# EAGLE board rcp2pads (EAGLE 9.0.1)
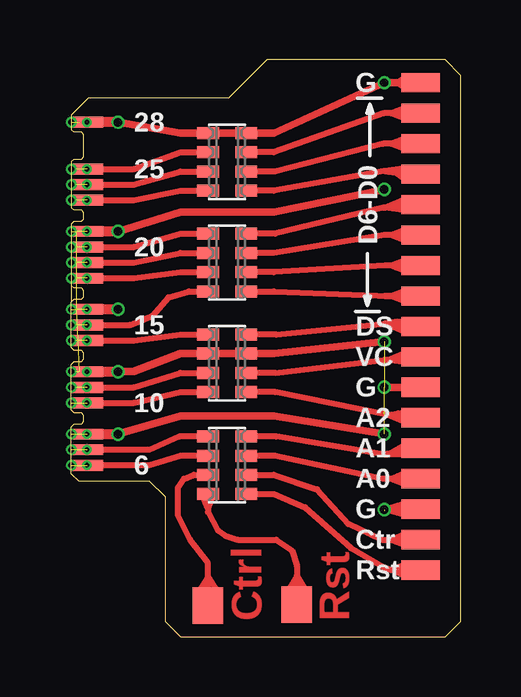
[diagram p0: board, top side]
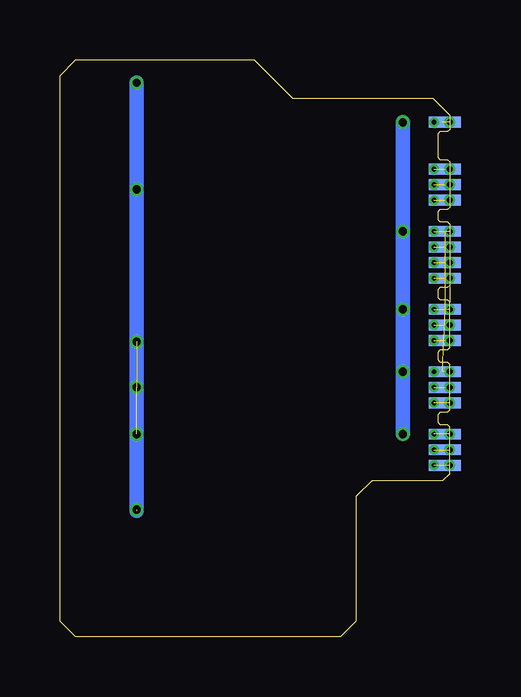
[diagram p1: board, bottom side, seen from below]

Size 16.25 x 24.05 mm. Coordinates in mm from the lower left corner, seen from the top.
Outline: 0,13.95 0.1,14.05 0.4,14.05 0.5,14.15 0.5,14.45 0.4,14.55 0.1,14.55 0,14.65 0,17.2 0.1,17.3 0.4,17.3 0.5,17.4 0.5,17.7 0.4,17.8 0.1,17.8 0,17.9 0,19.8 0.1,19.9 0.4,19.9 0.5,20 0.5,20.95 0.4,21.05 0.1,21.05 0,21.15 0,21.75 0.7,22.45 6.55,22.45 8.15,24.05 15.6,24.05 16.25,23.4 16.25,0.65 15.6,0 4.55,0 3.9,0.65 3.9,5.85 3.25,6.5 0.3,6.5 0,6.8 0,8.75 0.1,8.85 0.4,8.85 0.5,8.95 0.5,9.25 0.4,9.35 0.1,9.35 0,9.45 0,11.35 0.1,11.45 0.4,11.45 0.5,11.55 0.5,11.85 0.4,11.95 0.1,11.95 0,12.05 0,13.95
Outline: 0,14.6 0,13.95
Copper layers (1*16): Top 0.018mm / dielectric 1.55mm / Bottom 0.018mm
Design rules "Multi-CB_2L_100um-Tracks_OL35um": minimum track width 0.1mm, minimum drill 0.2mm, track to track 0.1mm, track to pad 0.1mm, pad to pad 0.1mm, via to via 0.1mm, smd to smd 0mil, copper to edge 0.2mm, drill to drill 0.2mm, minimum pad ring 0.125mm, minimum via ring 0.1mm, stop-mask expansion 2mil, vias tented up to drill 0.45mm, thermal gap 0.2mm

## Footprints (pad centres in the part's own frame; a part is rotated, then mirrored left to right if it is on the bottom)
CTS742C083 = smd 0.5 x 0.9: 1 -1.2,-0.8; 2 -0.4,-0.8; 3 0.4,-0.8; 4 1.2,-0.8; 5 1.2,0.8; 6 0.4,0.8; 7 -0.4,0.8; 8 -1.2,0.8
SMD0.8SQ = smd 1.27 x 1.524: P$1 0,0
SMD0,45-1,35 = smd 1.35 x 0.45: P$1 0,0
SMD0,8-1,6 = smd 0.8 x 1.6: P$1 0,0

## Placement (x,y rotation side)
E$1  [CTS742C083]  6.5,7.15 90 top
E$2  [SMD0.8SQ]  5.7,1.3 0 top
E$3  [CTS742C083]  6.5,19.8 270 top
E$4  [CTS742C083]  6.5,15.6 270 top
E$5  [CTS742C083]  6.5,11.4 270 top
E$6  [SMD0.8SQ]  9.4,1.35 0 top
E$8  [SMD0,45-1,35]  0.65,10.4 0 top
E$9  [SMD0,45-1,35]  0.65,11.05 0 top
E$10  [SMD0,45-1,35]  0.65,12.35 0 top
E$11  [SMD0,45-1,35]  0.65,13 0 top
E$12  [SMD0,45-1,35]  0.65,13.65 0 top
E$13  [SMD0,45-1,35]  0.65,14.95 0 top
E$14  [SMD0,45-1,35]  0.65,15.6 0 top
E$15  [SMD0,45-1,35]  0.65,16.25 0 top
E$16  [SMD0,45-1,35]  0.65,16.9 0 top
E$17  [SMD0,45-1,35]  0.65,18.2 0 top
E$18  [SMD0,45-1,35]  0.65,18.85 0 top
E$19  [SMD0,45-1,35]  0.65,19.5 0 top
E$20  [SMD0,8-1,6]  14.56,21.83 90 top
E$21  [SMD0,8-1,6]  14.56,23.1 90 top
E$22  [SMD0,45-1,35]  0.2,19.5 0 bottom
E$23  [SMD0,45-1,35]  0.2,18.85 0 bottom
E$24  [SMD0,45-1,35]  0.2,18.2 0 bottom
E$25  [SMD0,45-1,35]  0.2,16.9 0 bottom
E$26  [SMD0,45-1,35]  0.2,16.25 0 bottom
E$27  [SMD0,45-1,35]  0.2,15.6 0 bottom
E$28  [SMD0,45-1,35]  0.2,14.95 0 bottom
E$29  [SMD0,45-1,35]  0.2,13.65 0 bottom
E$30  [SMD0,45-1,35]  0.2,13 0 bottom
E$31  [SMD0,45-1,35]  0.2,12.35 0 bottom
E$32  [SMD0,45-1,35]  0.2,11.05 0 bottom
E$33  [SMD0,45-1,35]  0.2,10.4 0 bottom
E$36  [SMD0,8-1,6]  14.56,20.56 90 top
E$38  [SMD0,45-1,35]  0.65,9.75 0 top
E$39  [SMD0,8-1,6]  14.56,19.29 90 top
E$40  [SMD0,45-1,35]  0.65,7.8 0 top
E$41  [SMD0,45-1,35]  0.65,7.15 0 top
E$42  [SMD0,45-1,35]  0.2,9.75 0 bottom
E$43  [SMD0,45-1,35]  0.2,8.45 0 bottom
E$44  [SMD0,45-1,35]  0.2,7.8 0 bottom
E$45  [SMD0,45-1,35]  0.2,7.15 0 bottom
E$46  [SMD0,45-1,35]  0.65,21.45 0 top
E$47  [SMD0,45-1,35]  0.2,21.45 0 bottom
E$48  [SMD0,8-1,6]  14.56,18.02 90 top
E$49  [SMD0,8-1,6]  14.56,16.75 90 top
E$50  [SMD0,8-1,6]  14.56,15.48 90 top
E$51  [SMD0,8-1,6]  14.56,14.21 90 top
E$53  [SMD0,8-1,6]  14.56,12.94 90 top
E$54  [SMD0,8-1,6]  14.56,11.67 90 top
E$55  [SMD0,8-1,6]  14.56,10.4 90 top
E$56  [SMD0,8-1,6]  14.56,9.13 90 top
E$57  [SMD0,8-1,6]  14.56,7.86 90 top
E$58  [SMD0,8-1,6]  14.56,6.59 90 top
E$59  [SMD0,8-1,6]  14.56,5.32 90 top
E$60  [SMD0,8-1,6]  14.56,4.05 90 top
E$61  [SMD0,8-1,6]  14.56,2.78 90 top
GND  [SMD0,45-1,35]  0.65,8.45 0 top

## Library data of the parts
E$1 E$3-E$5 = resistor-net
E$2 E$6 E$8-E$33 E$36 E$38-E$51 E$53-E$61 GND = wirepad

## Nets
#DSYNC: E$5.1 E$10.P$1 E$31.P$1
#DSYNC.1: E$5.8 E$53.P$1
CTRL: E$1.7 E$2.P$1
CTRL.1: E$1.2 E$60.P$1
D0: E$3.2 E$19.P$1 E$22.P$1
D0.1: E$3.7 E$20.P$1
D1: E$3.3 E$18.P$1 E$23.P$1
D1.1: E$3.6 E$36.P$1
D2: E$3.4 E$17.P$1 E$24.P$1
D2.1: E$3.5 E$39.P$1
D3: E$4.1 E$15.P$1 E$26.P$1
D3.1: E$4.8 E$48.P$1
D4: E$4.2 E$14.P$1 E$27.P$1
D4.1: E$4.7 E$49.P$1
D5: E$4.3 E$13.P$1 E$28.P$1
D5.1: E$4.6 E$50.P$1
D6: E$4.4 E$11.P$1 E$30.P$1
D6.1: E$4.5 E$51.P$1
GND: E$3.1 E$3.8 E$5.2 E$5.7 E$9.P$1 E$12.P$1 E$16.P$1 E$21.P$1 E$25.P$1 E$29.P$1 E$32.P$1 E$43.P$1 E$46.P$1 E$55.P$1 E$59.P$1 GND.P$1
LRCLK: E$5.4 E$38.P$1
LRCLK.1: E$5.5 E$56.P$1
RST: E$1.8 E$6.P$1
RST.1: E$1.1 E$61.P$1
SCLK: E$1.6 E$41.P$1
SCLK.1: E$1.3 E$58.P$1
SDATA: E$1.5 E$40.P$1
SDATA.1: E$1.4 E$57.P$1
VCLK: E$5.3 E$8.P$1 E$33.P$1
VCLK.1: E$5.6 E$54.P$1

## Tracks (layer width: path | path; a pad name or v marks a point on that pad's centre or on a via)
#DSYNC  (via drill 0.2)  (1 unrouted)
  Top 0.254: E$10.P$1 2.6,12.35 4.55,12.6 E$5.1
  other vias: 0.65,12.35
#DSYNC1  (via drill 0.25)
  other vias: 0,12.35
#DSYNC.1
  Top 0.254: E$53.P$1 13.65,13.02 13.13,13.07 | 13.13,13.07 8.55,12.6 E$5.8 | 13.21,13.07 13.63,13.14 | 13.63,13.14 13.97,13.19 13.97,12.69 13.08,13.07 | 13.63,13.14 13.13,13.07
A_LRCLK  (via drill 0.2, 0.25)  (1 unrouted)
  other vias: 0.65,9.75 0,9.75
A_SCLK  (via drill 0.2, 0.25)  (1 unrouted)
  other vias: 0.65,7.15 0,7.15
A_SDATA  (via drill 0.2, 0.25)  (1 unrouted)
  other vias: 0,7.8 0.65,7.8
CTRL
  Top 0.254: E$2.P$1 5.7,2.5 | 5.7,2.5 5.2,1.7 | 5.7,2.5 6.2,1.7 | 5.7,2.5 5.7,3.07 4.95,4.05 4.45,5.07 4.45,6.21 4.7,6.59 5.1,6.75 E$1.7
CTRL.1
  Top 0.254: 13.34,4.05 12.95,4.05 11.55,4.7 10.25,6.15 8.45,6.75 E$1.2 | 13.34,4.05 E$60.P$1 | 13.34,4.05 13.97,4.3 13.97,3.8 13.34,4.05
D0  (via drill 0.2)  (1 unrouted)
  Top 0.254: E$19.P$1 2.6,19.5 4.55,20.2 E$3.2
  other vias: 0.65,19.5
D0.1
  Top 0.254: E$20.P$1 13.46,21.83 | 13.46,21.83 13.34,21.83 | 13.34,21.83 13.03,21.83 8.45,20.2 E$3.7 | 13.46,21.83 13.97,22.08 | 13.97,21.58 13.46,21.83 | 13.34,21.83 13.97,22.08 | 13.97,22.08 13.97,21.58 | 13.97,21.58 13.34,21.83
D1  (via drill 0.2)  (1 unrouted)
  Top 0.254: E$18.P$1 2.6,18.85 4.55,19.4 E$3.3
  other vias: 0.65,18.85
D1.1
  Top 0.254: E$36.P$1 13.46,20.56 | 13.46,20.56 13.34,20.56 | 13.34,20.56 13.01,20.56 8.5,19.4 E$3.6 | 13.46,20.56 13.97,20.81 | 13.97,20.31 13.46,20.56 | 13.34,20.56 13.97,20.81 | 13.97,20.81 13.97,20.31 | 13.97,20.31 13.34,20.56
D2  (via drill 0.2)  (1 unrouted)
  Top 0.254: E$17.P$1 2.6,18.2 4.55,18.6 E$3.4
  other vias: 0.65,18.2
D2.1
  Top 0.254: E$3.5 8.45,18.6 13.04,19.42 13.64,19.37 E$39.P$1 13.54,19.36 | 13.54,19.36 13.08,19.42 13.97,19.54 13.97,19.04 13.54,19.36
D3  (via drill 0.2)  (1 unrouted)
  Top 0.254: E$15.P$1 2.6,16.25 4.55,16.8 E$4.1
  other vias: 0.65,16.25
D3.1
  Top 0.254: 13.03,17.89 E$48.P$1 | 13.02,17.89 13.03,17.89 | 13.02,17.89 8.5,16.8 E$4.8 | 13.08,17.89 13.97,18.27 13.97,17.77 13.08,17.89 | 13.03,17.89 | 13.08,17.89 13.02,17.89
D4  (via drill 0.2)  (1 unrouted)
  Top 0.254: E$14.P$1 2.6,15.6 4.55,16 E$4.2
  other vias: 0.65,15.6
D4.1
  Top 0.254: E$49.P$1 13.34,16.75 | 13.34,16.75 13.05,16.75 8.45,16 E$4.7 | 13.34,16.75 13.97,17 13.97,16.5 13.34,16.75
D5  (via drill 0.2)  (1 unrouted)
  Top 0.254: E$13.P$1 2.6,14.95 4.55,15.2 E$4.3
  other vias: 0.65,14.95
D5.1
  Top 0.254: E$50.P$1 13.34,15.48 | 13.34,15.48 13.08,15.48 8.45,15.2 E$4.6 | 13.34,15.48 13.97,15.73 13.97,15.23 13.34,15.48
D6  (via drill 0.2)  (1 unrouted)
  Top 0.254: E$11.P$1 2.45,13 3.4,13.4 4.05,14.15 4.9,14.4 E$4.4
  other vias: 0.65,13
D6.1
  Top 0.254: E$4.5 8.45,14.4 13.3,14.2 13.06,14.21 13.34,14.21 | 13.34,14.21 E$51.P$1 | 13.34,14.21 13.97,14.46 13.97,13.96 13.34,14.21
D7  (via drill 0.25)
  other vias: 0,13
D8  (via drill 0.25)
  other vias: 0,14.95
D9  (via drill 0.25)
  other vias: 0,15.6
D10  (via drill 0.25)
  other vias: 0,16.25
D11  (via drill 0.25)
  other vias: 0,18.85
D12  (via drill 0.25)
  other vias: 0,18.2
D13  (via drill 0.25)
  other vias: 0,19.5
GND  (via drill 0.2, 0.25, 0.35)  (13 unrouted)
  Top 0.254: E$46.P$1 0.33,21.45 | 0.33,11.05 E$9.P$1 v0,11.05 | 13.08,5.32 13.97,5.57 13.97,5.07 13.08,5.32 | 13.65,5.3 v13.05,5.3 13.08,5.32 | 13.59,23.1 13.97,22.85 13.97,23.35 13.59,23.1
  Top 0.305: v1.95,11.05 2.6,11.05 4.55,11.8 E$5.2 E$5.7 8.45,11.8 v13.05,12.3 | v1.95,21.45 4.55,21 E$3.1 E$3.8 8.45,21 v13.05,23.1 13.59,23.1 E$21.P$1 | v13.05,10.4 E$55.P$1 | 14.56,5.3 13.65,5.3 | v1.95,8.45 4.55,9.2 8.45,9.2 v13.05,8.45 | v1.95,16.9 4.55,17.7 8.45,17.7 v13.05,18.65
  Top 0.406: v1.95,13.65 E$12.P$1 | E$9.P$1 v1.95,11.05 | v1.95,16.9 E$16.P$1 | v1.95,21.45 E$46.P$1 | GND.P$1 v1.95,8.45 | E$59.P$1 14.56,5.3
  Bottom 0.61: v1.95,21.45 v1.95,8.45 | v13.05,23.1 13.05,5.25
  other vias: 0.65,13.65 0,21.45 0,16.9 0,13.65 0.65,11.05 0.65,8.45 0,8.45 0.65,16.9 0.65,21.45
LRCLK
  Top 0.254: E$38.P$1 2.6,9.75 4.55,10.2 E$5.4
LRCLK.1
  Top 0.254: E$56.P$1 13.19,9.26 | 13.19,9.26 8.5,10.2 E$5.5 | 13.62,9.32 13.21,9.26 14.1,8.88 14.1,9.38 13.62,9.32 | 13.19,9.26 13.62,9.32
RST
  Top 0.254: 9.4,2.55 E$6.P$1 | 9.4,2.55 9.9,1.7 | 9.4,2.55 8.9,1.7 | 9.4,2.55 9.4,2.95 9.2,3.6 8.55,4.05 6.95,4.05 6.45,4.2 6.1,4.45 5.7,5.2 5.7,5.35 | E$1.8 5.7,5.35 | 5.7,5.35 5.45,5.95 | 5.7,5.35 5.95,5.95
RST.1
  Top 0.254: 13.34,2.78 13.02,2.91 11.65,3.7 9.75,5.4 8.45,5.95 E$1.1 | 13.34,2.78 E$61.P$1 | 13.34,2.78 13.97,3.03 13.97,2.53 13.34,2.78
SCLK
  Top 0.254: E$41.P$1 3.25,7.15 4.55,7.55 E$1.6
SCLK.1
  Top 0.254: E$58.P$1 13.34,6.59 | 13.34,6.59 12.98,6.59 8.5,7.55 E$1.3 | 13.34,6.59 13.97,6.84 13.97,6.34 13.34,6.59
SDATA
  Top 0.254: E$40.P$1 3.25,7.8 4.5,8.35 E$1.5
SDATA.1
  Top 0.254: E$57.P$1 13.03,7.61 | 13.03,7.61 13.01,7.61 8.55,8.35 E$1.4 | 13.21,7.61 14.1,8.11 14.1,7.61 13.21,7.61 | 13.03,7.61 13.21,7.61
VCLK  (via drill 0.2)  (1 unrouted)
  Top 0.254: E$8.P$1 2.6,10.4 4.55,11 E$5.3
  other vias: 0.65,10.4
VCLK1  (via drill 0.25)
  other vias: 0,10.4
VCLK.1
  Top 0.254: E$54.P$1 13.66,11.59 13.02,11.54 | 13.02,11.54 8.5,11 E$5.6 | 13.21,11.54 14.1,11.92 14.1,11.42 13.21,11.54 | 13.21,11.54 13.02,11.54

## Text on the board
Top: Ctrl | Rst
tPlace: G | 28 | 25 | D6-D0 | 20 | 15 | DS | VC | G | 10 | A2 | A1 | 6 | A0 | G | Ctr | Rst